# EAGLE board XICIE_AFE_SMD_revB (EAGLE 6.5.0)
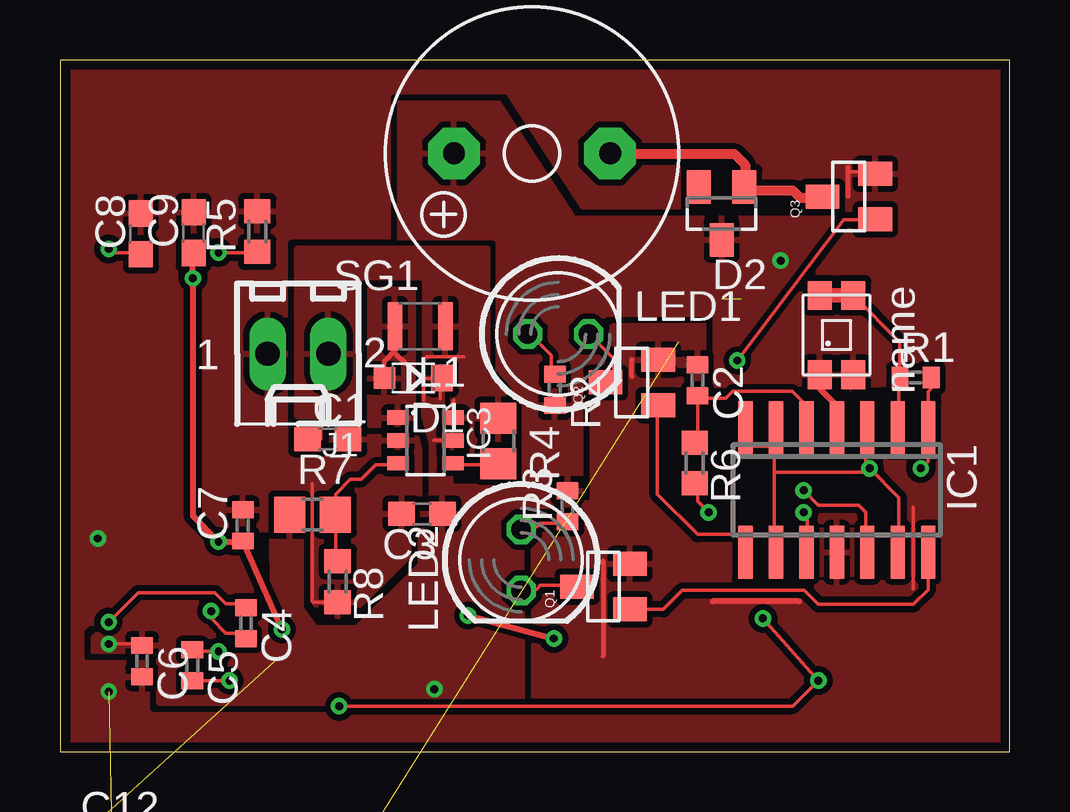
[diagram p0: board, top side]
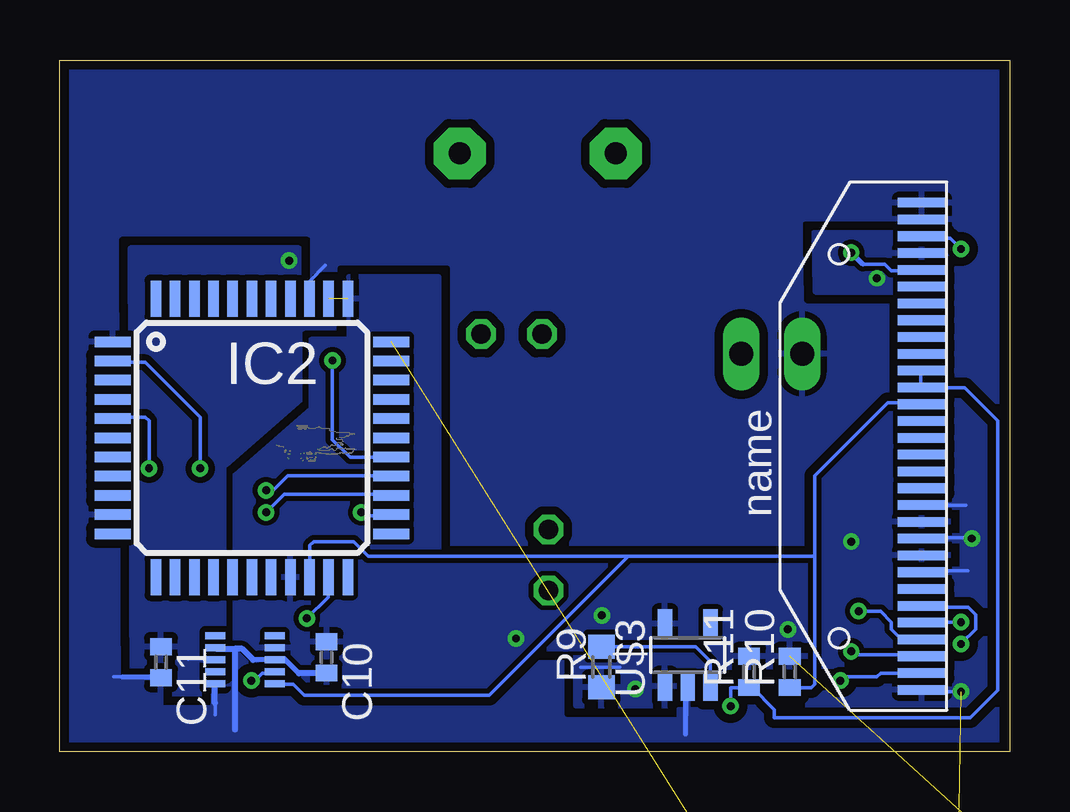
[diagram p1: board, bottom side, seen from below]

Size 39.57 x 28.83 mm. Coordinates in mm from the lower left corner, seen from the top.
Outline: 0,0 39.57,0 39.57,28.83 0,28.83 0,0
Copper layers (1*16): Top 0.0356mm / dielectric 1.5011mm / Bottom 0.0356mm
Design rules "LaenPCBOrder": minimum track width 6mil, minimum drill 13mil, track to track 6mil, track to pad 6mil, pad to pad 6mil, via to via 6mil, smd to smd 6mil, copper to edge 15mil, drill to drill 6mil, minimum pad ring 7mil, minimum via ring 7mil, stop-mask expansion 3mil, vias tented up to drill 0mil, thermal gap 10mil

## Footprints (pad centres in the part's own frame; a part is rotated, then mirrored left to right if it is on the bottom)
C0603 = smd 1.1 x 1: 1 -0.85,0; 2 0.85,0
C0402 = smd 0.7 x 0.9: 1 -0.65,0; 2 0.65,0
SMINI2-F5-B = smd 0.9 x 0.9: A 1.2,0 | smd 0.9 x 1.1: C -1.2,0
SOT23 = smd 1 x 1.4: 1 -0.95,-1.1; 2 0.95,-1.1; 3 0,1.1
SO14 = smd 0.6 x 2.2: 1 -3.81,-2.6; 2 -2.54,-2.6; 3 -1.27,-2.6; 4 0,-2.6; 5 1.27,-2.6; 6 2.54,-2.6; 7 3.81,-2.6; 8 3.81,2.6; 9 2.54,2.6; 10 1.27,2.6; 11 0,2.6; 12 -1.27,2.6; 13 -2.54,2.6; 14 -3.81,2.6
TQFP44 = smd 1.5 x 0.44: 1 -5.8,4; 2 -5.8,3.2; 3 -5.8,2.4; 4 -5.8,1.6; 5 -5.8,0.8; 6 -5.8,0; 7 -5.8,-0.8; 8 -5.8,-1.6; 9 -5.8,-2.4; 10 -5.8,-3.2; 11 -5.8,-4; 23 5.8,-4; 24 5.8,-3.2; 25 5.8,-2.4; 26 5.8,-1.6; 27 5.8,-0.8; 28 5.8,0; 29 5.8,0.8; 30 5.8,1.6; 31 5.8,2.4; 32 5.8,3.2; 33 5.8,4 | smd 0.44 x 1.5: 12 -4,-5.8; 13 -3.2,-5.8; 14 -2.4,-5.8; 15 -1.6,-5.8; 16 -0.8,-5.8; 17 0,-5.8; 18 0.8,-5.8; 19 1.6,-5.8; 20 2.4,-5.8; 21 3.2,-5.8; 22 4,-5.8; 34 4,5.8; 35 3.2,5.8; 36 2.4,5.8; 37 1.6,5.8; 38 0.8,5.8; 39 0,5.8; 40 -0.8,5.8; 41 -1.6,5.8; 42 -2.4,5.8; 43 -3.2,5.8; 44 -4,5.8
SOT23-6 = smd 0.6 x 0.9: 1 -0.95,-1.15; 2 0,-1.15; 3 0.95,-1.15; 4 0.95,1.15; 5 0,1.15; 6 -0.95,1.15
6410-02 = drill 1.016 long: 1 1.27,0; 2 -1.27,0
L2518 = smd 0.6 x 2: 1 -1.05,0; 2 1.05,0
LED5MM = drill 0.813 octagon: A -1.27,0; K 1.27,0
R0402 = smd 0.7 x 0.9: 1 -0.65,0; 2 0.65,0
R0805 = smd 1.3 x 1.5: 1 -0.95,0; 2 0.95,0
R0603 = smd 1 x 1.1: 1 -0.85,0; 2 0.85,0
F/QMX = drill 0.914 pad 2.159 octagon: + 3.251,0; - -3.251,0
PHOTO_SMD = smd 1.2 x 1: ANODE1 -1.65,0.7; ANODE2 -1.65,-0.7; CATHODE1 1.65,0.7; CATHODE2 1.65,-0.7
FLEX0.7X30 = smd 0.4 x 2: P1 -10.15,0; P2 -9.45,0; P3 -8.75,0; P4 -8.05,0; P5 -7.35,0; P6 -6.65,0; P7 -5.95,0; P8 -5.25,0; P9 -4.55,0; P10 -3.85,0; P11 -3.15,0; P12 -2.45,0; P13 -1.75,0; P14 -1.05,0; P15 -0.35,0; P16 0.35,0; P17 1.05,0; P18 1.75,0; P19 2.45,0; P20 3.15,0; P21 3.85,0; P22 4.55,0; P23 5.25,0; P24 5.95,0; P25 6.65,0; P26 7.35,0; P27 8.05,0; P28 8.75,0; P29 9.45,0; P30 10.15,0
SOT23-5 = smd 0.6 x 1.2: 1 -0.95,-1.306; 2 0,-1.306; 3 0.95,-1.306; 4 0.95,1.306; 5 -0.95,1.306
DFN10 = smd 0.3 x 0.825: P1 -1,1.24; P2 -0.5,1.24; P3 0,1.24; P4 0.5,1.24; P5 1,1.24; P6 -1,-1.24; P7 -0.5,-1.24; P8 0,-1.24; P9 0.5,-1.24; P10 1,-1.24

## Placement (x,y rotation side)
C1  4.7 uF  [C0603]  11.16,13.04 0 top
C2  4700 pF  [C0402]  26.57,15.49 270 top
C3  4.7 uF  [C0603]  15.09,9.93 180 top
C4  1 uF  [C0402]  7.75,5.36 270 top
C5  1 uF  [C0402]  5.51,3.61 270 top
C6  1 uF  [C0402]  3.42,3.79 270 top
C7  1 uF  [C0402]  7.62,9.44 90 top
C8  2.2 uF  [C0603]  3.37,21.59 90 top
C9  4.7 uF  [C0603]  5.57,21.64 90 top
C10  0.1 uF  [C0402]  28.47,3.94 270 bottom
C11  0.1 uF  [C0402]  35.37,3.74 270 bottom
C12  0.1 uF  [C0402]  1.5,-3.56 0 top  (outside the outline)
C13  1 uF  [C0402]  1.5,-8.31 0 top  (outside the outline)
C14  0.1 uF  [C0402]  1.5,-13.06 0 top  (outside the outline)
C15  1 uF  [C0402]  1.5,-17.81 0 top  (outside the outline)
C16  1 uF  [C0402]  1.5,-22.56 0 top  (outside the outline)
C17  0.1 uF  [C0402]  1.5,-27.3 0 top  (outside the outline)
D1  [SMINI2-F5-B]  14.72,15.58 180 top
D2  [SOT23]  27.57,22.44 180 top
IC1  LM324D  [SO14]  32.37,10.92 180 top
IC2  CY8C4245T  [TQFP44]  31.58,13.09 0 bottom
IC3  AAT1217  [SOT23-6]  15.23,12.98 270 top
J1  22-27-2021-02  [6410-02]  9.92,16.59 180 top
L1  4.7 uH  [L2518]  15.01,17.74 180 top
LED1  [LED5MM]  20.76,17.41 0 top
LED2  [LED5MM]  19.22,8 270 top
Q1  MOSFET-NCHANNELBSS123LT1G  [SOT23]  22.65,6.89 90 top
Q2  MOSFET-NCHANNELBSS123LT1G  [SOT23]  23.83,15.4 90 top
Q3  MOSFET-NCHANNELBSS123LT1G  [SOT23]  32.87,23.14 90 top
R1  10 M  [R0402]  35.65,15.6 0 top
R2  1.1  [R0402]  20.62,15.09 270 top
R3  1.1  [R0402]  21.15,10.24 90 top
R4  1.02 M  [R0805]  18.27,12.96 270 top
R5  390K  [R0603]  8.22,21.69 90 top
R6  390 K  [R0603]  26.45,12.04 270 top
R7  1.02 M  [R0805]  10.52,9.89 0 top
R8  604 k  [R0603]  11.57,7.09 270 top
R9  150 k  [R0603]  17.02,3.54 90 bottom
R10  2.2 k  [R0402]  9.17,3.34 90 bottom
R11  2.2 k  [R0402]  10.87,3.34 90 bottom
SG1  F/QMX  [F/QMX]  19.67,24.94 180 top
U$1  PD15-22C-TR8  [PHOTO_SMD]  32.36,17.37 270 top
U$2  ER-OLED0.96  [FLEX0.7X30]  3.67,12.74 90 bottom
U$3  AAT3221  [SOT23-5]  13.42,4.04 0 bottom
U$4  MMA7660FC  [DFN10]  31.87,3.84 90 bottom

## Library data of the parts
C1-C17 R1-R4 R6-R11 = rcl
D1 IC3 L1 U$1-U$4 = juliano
D2 = diode
IC1 = linear
IC2 = juliano; OC_FARNELL: unknown; OC_NEWARK: unknown
J1 = con-molex; OC_FARNELL: unknown; OC_NEWARK: unknown
LED1 LED2 = led
Q1-Q3 = SparkFun-DiscreteSemi; PROD_ID: TRANS-08345
R5 = resistor
SG1 = buzzer; OC_FARNELL: unknown; OC_NEWARK: unknown

## Nets
!MMA_INT: IC2.28
+3V3 [V]: C3.1 C6.1 C11.1 D1.C D2.3 IC1.4 IC3.5 R2.2 R3.2 R7.1 R9.1 SG1.+ U$1.CATHODE1 U$1.CATHODE2 U$2.P6 U$3.1 U$4.P3
BUZZ: IC2.27 Q3.1
C1N: C4.1 U$2.P5
C1P: C4.2 U$2.P4
C2N: C5.1 U$2.P3
C2P: C5.2 U$2.P2
CS#: U$2.P13
D3: U$2.P21
D4: U$2.P22
D5: U$2.P23
D6: U$2.P24
D7: U$2.P25
D/C#: U$2.P15
E/RD#: U$2.P17
GND [GND]: C1.2 C2.1 C3.2 C6.2 C7.2 C8.2 C9.2 C10.2 C11.2 C12.2 C13.2 C14.2 C15.2 C16.2 C17.2 IC1.11 IC2.1 IC2.10 IC2.36 IC3.2 J1.1 Q1.2 Q2.2 Q3.2 R5.2 R8.2 U$2.P1 U$2.P8 U$2.P10 U$2.P12 U$2.P29 U$2.P30 U$3.2 U$4.P1 U$4.P4 U$4.P8
IR: IC1.12 IC2.26
IREF: R5.1 U$2.P26
N$1: IC1.2 R1.1 U$1.ANODE1 U$1.ANODE2
N$3: IC1.8 Q2.1
N$4: IC1.14 Q1.1
N$5: LED1.K Q2.3
N$6: LED2.K Q1.3
N$7: LED1.A R2.1
N$8: LED2.A R3.1
N$9: C2.2 IC1.5 R6.1
N$10 [V]: C16.1 IC2.33
N$12: IC3.3 R7.2 R8.1
N$13: D2.1 Q3.3 SG1.-
N$14: R9.2 U$3.3
N.C.: U$2.P7
P0.6: IC2.30
P1.2: IC2.39
P2.2: IC2.4
P2.6: IC2.8
P3.6: IC2.17
PWM_VREF: IC2.24 R6.2
R: IC1.10 IC2.25
R/W#: U$2.P16
RES#: U$2.P14
SCL: IC2.20 R10.1 U$2.P18 U$4.P6
SDA: IC2.21 R11.1 U$2.P19 U$2.P20 U$4.P7
SENSOROUT: IC1.1 IC2.5 R1.2
SHUTDOWN: IC3.4 R4.2
SW: D1.A IC3.1 L1.2
VBAT [V]: C1.1 IC3.6 J1.2 L1.1 R4.1
VCC [V]: C7.1 C9.1 C10.1 C12.1 C13.1 C14.1 C15.1 C17.1 IC2.19 IC2.34 IC2.35 R10.2 R11.2 U$2.P9 U$2.P11 U$2.P27 U$3.5 U$4.P9
VCC_DISPLAY [V]: C8.1 U$2.P28
VREF: IC1.3 IC1.6 IC1.7 IC1.9 IC1.13 IC2.2

## Tracks (layer width: path | path; a pad name or v marks a point on that pad's centre or on a via)
+3V3  (via drill 0.33)
  Top 0.152: v2.03,4.5 3.4,4.5 C6.1 | U$1.CATHODE1 33.12,15.77 33.12,15.84 | 31.9,15.62 U$1.CATHODE2 | IC3.5 15.57,12.98 | D1.C 15.85,15.58 15.85,15.57 | 15.85,15.57 15.85,14.71 | 15.16,14.68 15.16,15.55 15.85,15.57
  Top 0.254: U$1.CATHODE2 31.65,15.14 32.37,14.42 IC1.4
  Bottom 0.152: v2.03,4.5 1.42,5.11 1.42,5.72 1.73,6.02 3.56,6.02 U$2.P6 | 17.14,2.56 17.12,2.67 R9.1 17.27,2.67 | 33.12,3.89 U$4.P3 33.12,3.89 | 33.12,3.89 34.21,3.89 34.24,3.86 | 16.26,3.53 17.88,3.53
  other vias: 30.02,20.47 15.6,2.62
  pour Top (isolate 0.229, rank 5): 19.22,10.24 19.24,2.03 4.14,2.03 4.14,4.19 1.4,4.19 1.4,4.75 3.3,6.68 8.89,6.68 8.81,9.14 10.03,9.3 10.03,5.99 10.62,5.18 12.4,5.18 15.04,7.8 15.06,10.64 15.49,10.64 15.49,12.9 15.04,14.53 15.04,16.38 16.25,16.36 16.26,11.07 19.37,11.07 19.37,14.79 18.07,14.79 18.07,20.84 14.17,21.04 14.17,27.04 18.27,27.04 21.39,22.22 32.59,22.22 31.29,19.99 35.23,16.33 35.2,15.34 33.1,15.27 32.87,15.29 32.81,15.02 31.91,15 31.89,15.19 28.47,15.29 27.32,15.29 27.32,18.24 22.61,18.24 22.61,15.06 21.67,15.14 21.67,10.24
  pour Bottom (rank 5): 8.84,1.93 18.07,1.93 18.07,6.48 9.42,5.69
  pour Bottom (isolate 0.254, rank 5): 36.57,2.44 28.1,2.44 28.18,19.18 29.62,19.18 29.62,20.98 36.64,20.98
BUZZ  (via drill 0.33)
  Top 0.152: v28.22,16.31 32.66,22.17 33.88,22.17 Q3.1
  Bottom 0.152: IC2.27 25.81,12.27 27.48,12.27 28.22,13.01 v28.22,16.31
C1N  (via drill 0.33)
  Top 0.152: v2.03,5.41 3.25,6.63 6.45,6.63 6.91,6.17 7.37,6.17 C4.1
  Bottom 0.152: v2.03,5.41 3.56,5.41 U$2.P5
C1P  (via drill 0.33)
  Top 0.152: v6.3,5.87 6.3,5.56 6.91,4.95 7.37,4.95 C4.2
  Bottom 0.152: v6.3,5.87 5.38,5.87 4.93,5.41 4.93,5.11 4.47,4.65 3.71,4.65 U$2.P4
C2N  (via drill 0.33)
  Top 0.152: v6.6,4.19 5.54,4.19 C5.1
  Bottom 0.152: v6.6,4.19 6.45,4.04 3.71,4.04 U$2.P3
C2P  (via drill 0.33)
  Top 0.152: v7.06,2.97 5.54,2.97 C5.2
  Bottom 0.152: U$2.P2 3.71,3.28 5.38,3.28 5.54,3.12 6.91,3.12 v7.06,2.97 7.21,2.82
GND  (via drill 0.33)  (6 unrouted)
  Top 0.152: 10.52,11.18 10.52,6.27 10.55,6.24 R8.2 | 35.56,10.19 35.56,6.81 | Q3.2 33.87,24.18 32.84,24.18
  Top 0.203: 23.82,15.65 23.82,16.36 | 22.63,7.95 22.63,3.99 | 32.84,23.17 32.84,24.18 32.84,24.36
  Top 0.254: 30.78,6.27 27.2,6.27
  Bottom 0.152: U$4.P1 33.12,2.82 33.1,2.79 33.1,1.55 | 30.23,3.89 30.53,3.89 U$4.P8 | 28.55,3.28 C10.2 | 33.12,4.34 U$4.P4 33.06,4.29 | 35.41,3.12 C11.2 35.4,3.12 37.34,3.12 | 13.46,1.53 13.46,2.67 U$3.2 | v2.03,2.52 3.56,2.52 U$2.P1 | 1.75,7.54 3.56,7.54 U$2.P8 | 1.65,8.91 3.56,8.91 U$2.P10 | 1.83,10.29 U$2.P12 | IC2.36 29.18,19.62 28.52,20.27
  Bottom 0.203: 36.97,3.12 35.41,3.12 | U$4.P8 31.52,3.84 | 29.62,3.28 30.23,3.89 | U$3.2 13.51,2.63 13.51,0.74
  Bottom 0.254: 33.12,2.03 33.12,2.82 | 28.55,3.28 29.62,3.28 | 31.52,3.84 31.98,4.29 32.28,4.29 | 33.06,4.29 32.28,4.29 | 32.28,4.29 32.28,0.94
  other vias: 1.57,8.89
  pour Top (isolate 0.254, rank 6): 0.56,0.38 39.07,0.38 39.07,29.34 0.56,29.34
  pour Bottom (isolate 0.356, rank 6): 0.56,0.38 39.07,0.38 39.07,29.34 0.56,29.34
IR  (via drill 0.33)
  Top 0.152: v30.99,10.9 31.6,10.29 33.27,10.29 33.58,9.98 33.58,8.46 IC1.12
  Bottom 0.152: v30.99,10.9 30.68,10.9 30.07,11.51 25.81,11.51 IC2.26
IREF  (via drill 0.33)
  Top 0.152: v6.6,20.8 8.13,20.8 R5.1
  Bottom 0.152: U$2.P26 3.71,20.04 4.93,20.04 5.21,20.32 6.12,20.32
  Bottom 0.203: 6.12,20.32 v6.6,20.8
N$1
  Top 0.152: IC1.2 34.95,13.64 34.95,15.47 R1.1 35,17.08 U$1.ANODE1
  Top 0.61: U$1.ANODE2 U$1.ANODE1
N$3
  Top 0.152: Q2.1 24.89,14.4 24.89,10.74 26.57,9.07 28.55,9.07 28.55,8.46 IC1.8
N$4
  Top 0.152: IC1.14 36.17,6.76 35.56,6.15 31.6,6.15 31.01,6.73 25.93,6.73 25.14,5.94 Q1.1
N$5
  Top 0.152: Q2.3 22.76,15.47 23.06,15.47 23.06,16.38 22.15,17.3 LED1.K
N$6
  Top 0.152: Q1.3 21.54,6.93 20.01,6.93 19.86,6.78 19.25,6.78 LED2.K
N$7
  Top 0.152: R2.1 20.47,15.77 20.47,16.54 19.56,17.45 LED1.A
N$8
  Top 0.152: R3.1 21.08,9.52 20.01,9.52 19.86,9.37 19.71,9.52 19.41,9.52 19.25,9.37 LED2.A
N$9
  Top 0.152: R6.1 26.57,13.03 26.57,14.71 C2.2 26.67,14.73 27.74,14.73 28.04,15.04 30.51,15.04 31.1,14.45 IC1.5
N$10  (1 unrouted)
N$12
  Top 0.152: IC3.3 14.07,11.96 13.16,11.96 12.55,11.35 12.09,11.35 11.48,10.74 11.48,9.98 R7.2 11.48,9.83 11.48,8 R8.1
N$13
  Top 0.152: 28.7,23.39 28.55,23.24 28.4,23.39 D2.1 28.55,23.55 | 31.75,23.09 Q3.3
  Top 0.406: 31.75,23.09 30.84,23.09 30.53,23.39 28.7,23.39 | 28.55,23.55 28.55,24.46 28.09,24.92 23.06,24.92 SG1.-
N$14
  Bottom 0.152: U$3.3 12.47,3.79 13.07,4.39 R9.2
PWM_VREF  (via drill 0.33)
  Top 0.152: v27.03,9.98 26.57,10.44 26.57,11.05 R6.2
  Bottom 0.152: v27.03,9.98 26.87,9.83 25.81,9.83 IC2.24
R  (via drill 0.33)
  Top 0.152: v30.99,9.98 31.14,9.83 31.14,8.46 IC1.10
  Bottom 0.152: v30.99,9.98 30.23,10.74 25.81,10.74 IC2.25
SCL
  Bottom 0.152: U$4.P6 30.53,2.82 29.84,2.82 29.39,2.36 21.69,2.36 15.9,8.15 | R10.1 9.04,2.67 8.28,2.67 8.13,2.82 8.13,8.15 | 8.13,8.15 15.9,8.15 | 15.9,8.15 26.72,8.15 27.33,8.76 29.01,8.76 29.16,8.61 29.16,7.39 IC2.20 | U$2.P18 3.71,14.55 5.08,14.55 8.13,11.51 8.13,8.15
SDA  (via drill 0.33)
  Top 0.152: v11.63,1.91 30.53,1.91 v31.6,2.97 v29.29,5.56
  Bottom 0.152: v31.6,2.97 31.44,2.97 31.14,3.28 30.68,3.28 U$4.P7 | IC2.21 28.4,7.24 28.4,6.45 v29.29,5.56 | U$2.P20 3.71,15.77 3.71,15.32 U$2.P19 3.56,15.16 1.88,15.16 0.51,13.79 0.51,2.56 1.65,1.42 9.8,1.42 9.8,1.75 10.72,2.67 R11.1 10.87,2.67 11.63,2.67 v11.63,1.91
SENSOROUT  (via drill 0.33)
  Top 0.152: 36.17,13.64 36.17,15.01 36.32,15.16 36.32,15.47 R1.2 | 36.17,13.64 IC1.1 36.17,13.49 36.17,12.17 | 36.17,13.64 36.17,12.12 v35.86,11.81
  Bottom 0.152: v35.86,11.81 35.86,13.79 36.02,13.95 37.24,13.95 IC2.5
SHUTDOWN
  Top 0.152: IC3.4 16.51,11.96 18.19,11.96 R4.2
SW
  Top 0.152: L1.2 13.96,16.73 | 13.51,16.28 D1.A | 13.89,16.59 14,16.59
  Top 0.203: 13.96,16.73 13.51,16.28 | 14,16.59 14.38,16.2
  pour Top (isolate 0.254, rank 2): 12.92,13.59 12.92,19.28 14.71,19.28 14.71,13.64
VBAT
  Top 0.152: 10.87,13.99 10.87,13.03 10.41,13.03 C1.1 | IC3.6 16.38,14.62 16.41,14.66 | 15.29,16.46 16.81,16.46
  pour Top (isolate 0.254, rank 3): 9.87,13.99 12.87,13.99 12.82,19.44 15.07,19.44 15.07,15.99 16.37,15.99 16.39,11.66 18.9,11.79 18.9,14.44 17.83,15.62 17.83,20.95 9.87,20.95
VCC  (via drill 0.33)  (6 unrouted)
  Top 0.152: 7.52,8.76 C7.1 | 5.54,20.65 C9.1
  Top 0.254: 7.52,8.76 v6.6,8.76 5.54,9.83 v5.54,19.74 5.54,20.65 | C7.1 v9.25,5.11 | v16.99,5.69 v20.57,4.72
  Bottom 0.152: U$2.P11 3.71,9.52 3.71,9.59 | U$3.5 14.38,5.41 14.39,5.32
  pour Bottom (isolate 0.203, rank 4): 19.86,4.32 13.21,4.3 12.47,3.53 2.57,3.64 2.57,21.62 8.15,21.62 8.1,19.18 4.83,19.18 4.85,14.44 8.13,11.53 8.14,8.1 23.79,8.1 23.79,19.79 27.52,19.79 27.52,17.17 29.11,17.17 29.11,14.27 32.27,11.51 32.27,2.49 21.84,2.49
VCC_DISPLAY  (via drill 0.33)
  Top 0.152: v2.03,20.95 2.18,20.8 3.25,20.8 C8.1
  Bottom 0.152: v2.03,20.95 2.49,21.41 3.56,21.41 U$2.P28
VREF  (via drill 0.33)
  Top 0.152: 29.77,12.73 29.77,13.49 IC1.6 29.77,12.73 | 29.77,12.73 29.77,11.66 | 29.77,11.66 29.77,8.46 IC1.9 | 29.77,12.73 28.55,12.73 28.55,13.49 IC1.7 | v33.73,11.81 33.58,11.96 33.58,13.49 IC1.3 | v33.73,11.81 34.95,10.59 34.95,8.46 IC1.13 | 29.77,11.66 33.58,11.66 v33.73,11.81
  Bottom 0.152: v33.73,11.81 33.73,13.95 36.02,16.23 37.24,16.23 IC2.2